# Altium PCB ESP32_SENSORS_BATTERY.PcbDoc
Units mm, origin at the board's own origin, x right, y up, seen from the top; angles counter-clockwise.
Board outline 54 x 48.94 mm, 2 copper layers (Top Layer, Bottom Layer); 31 components, 23 nets, 153 pads, 0 vias.
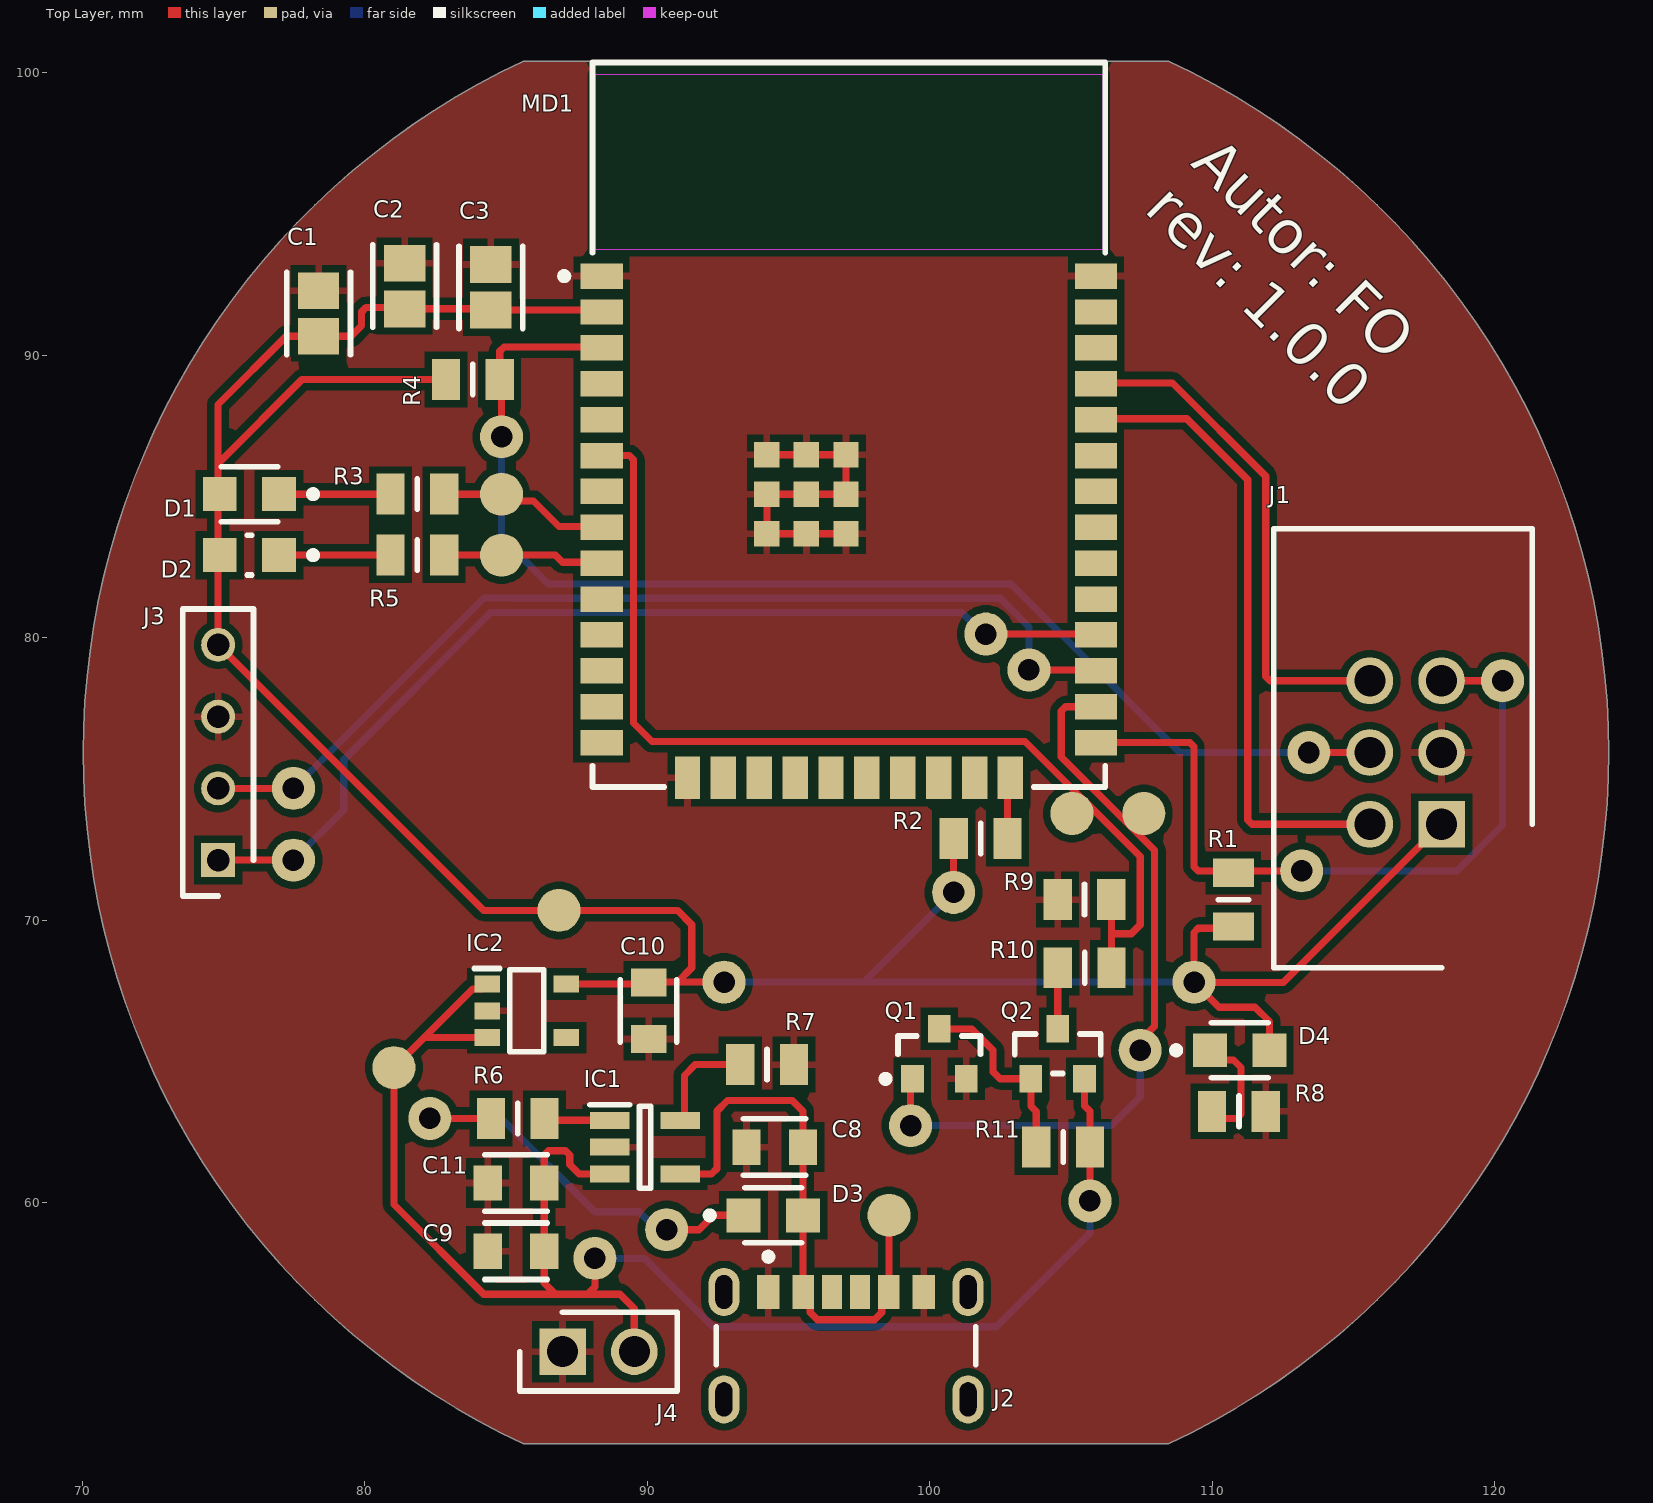
[diagram p0: Top Layer view]
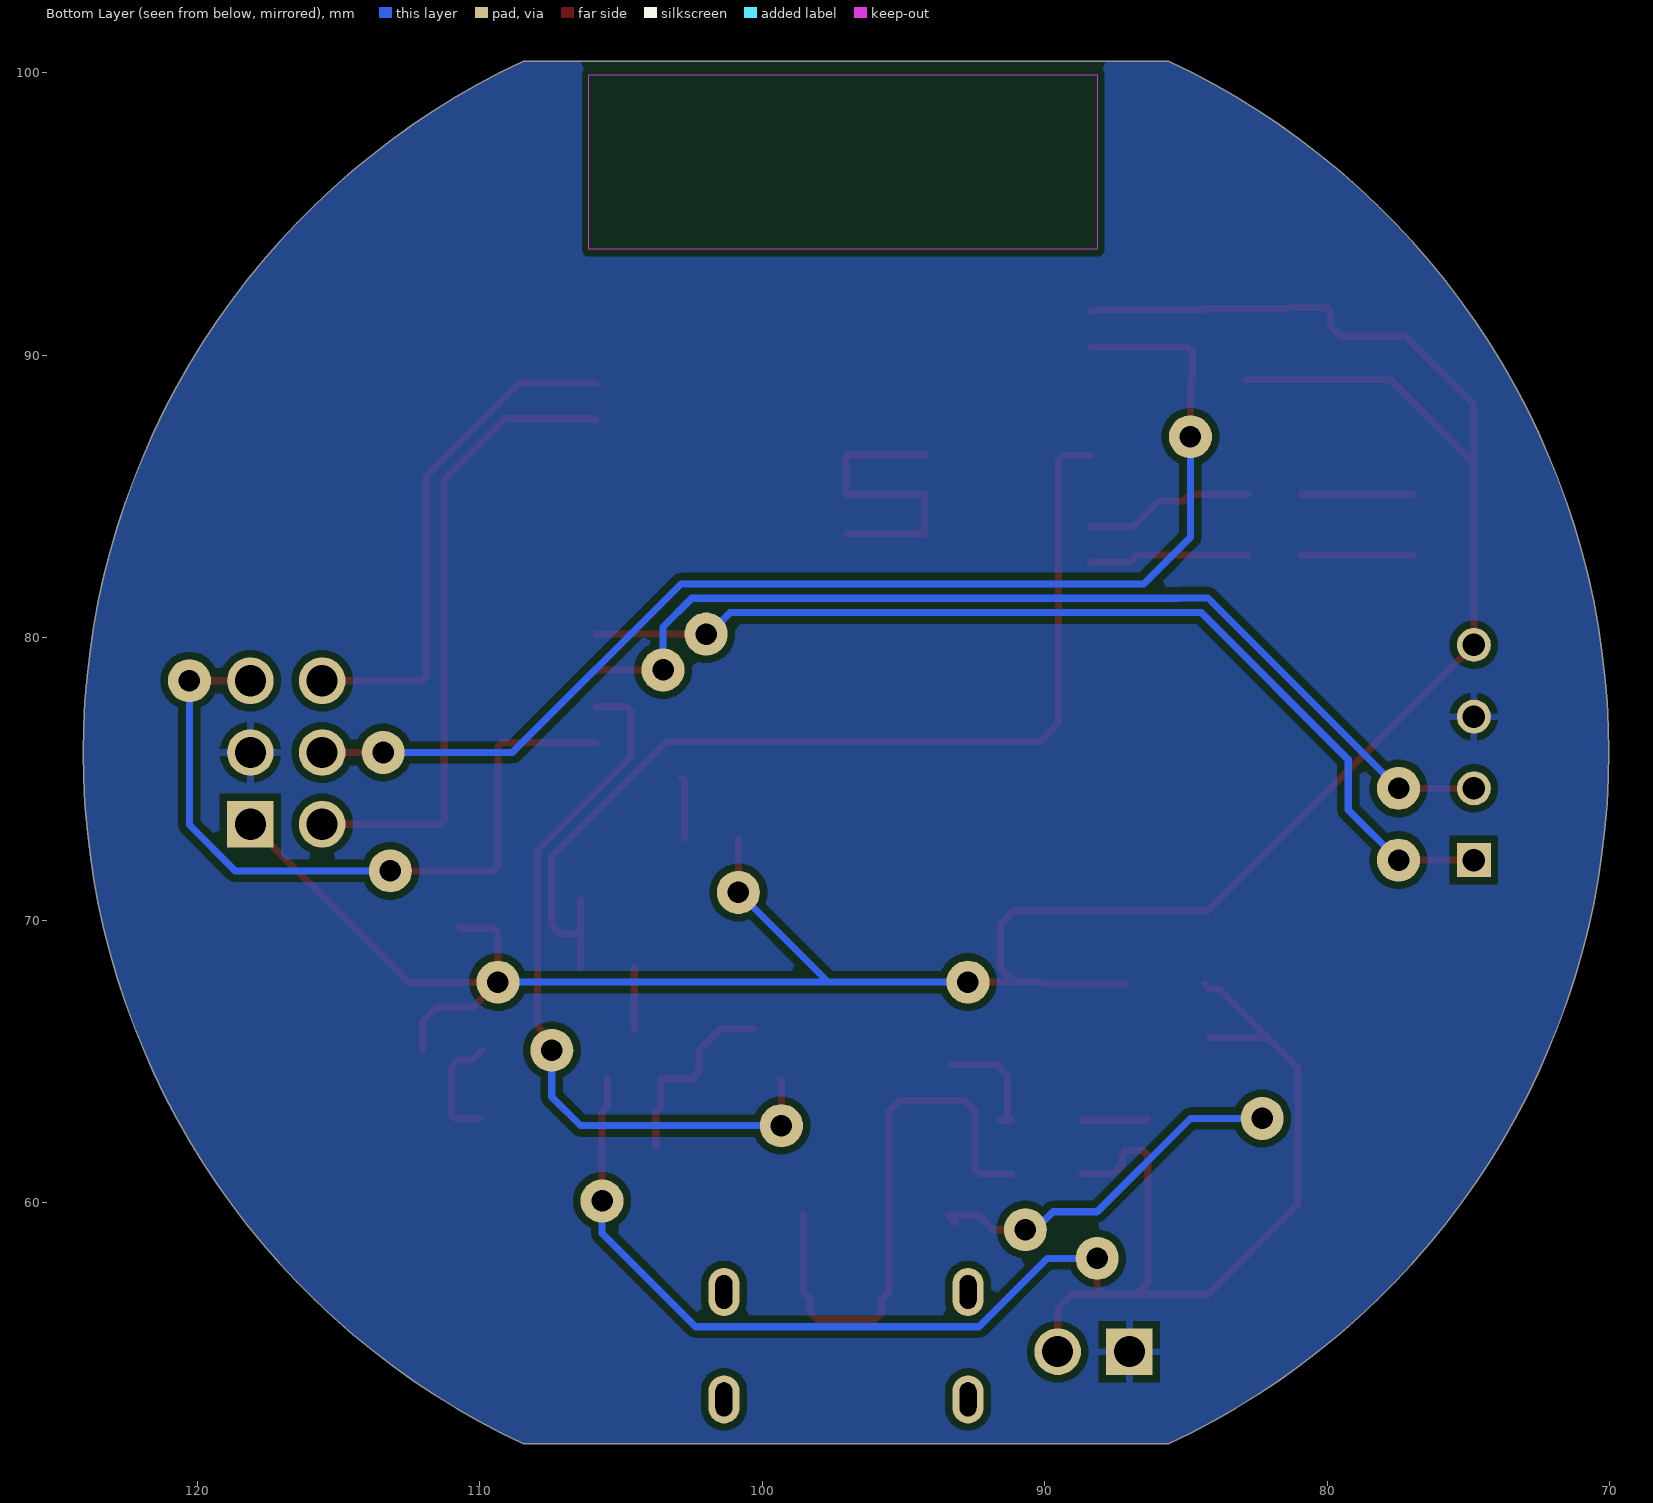
[diagram p1: Bottom Layer view, seen from below]
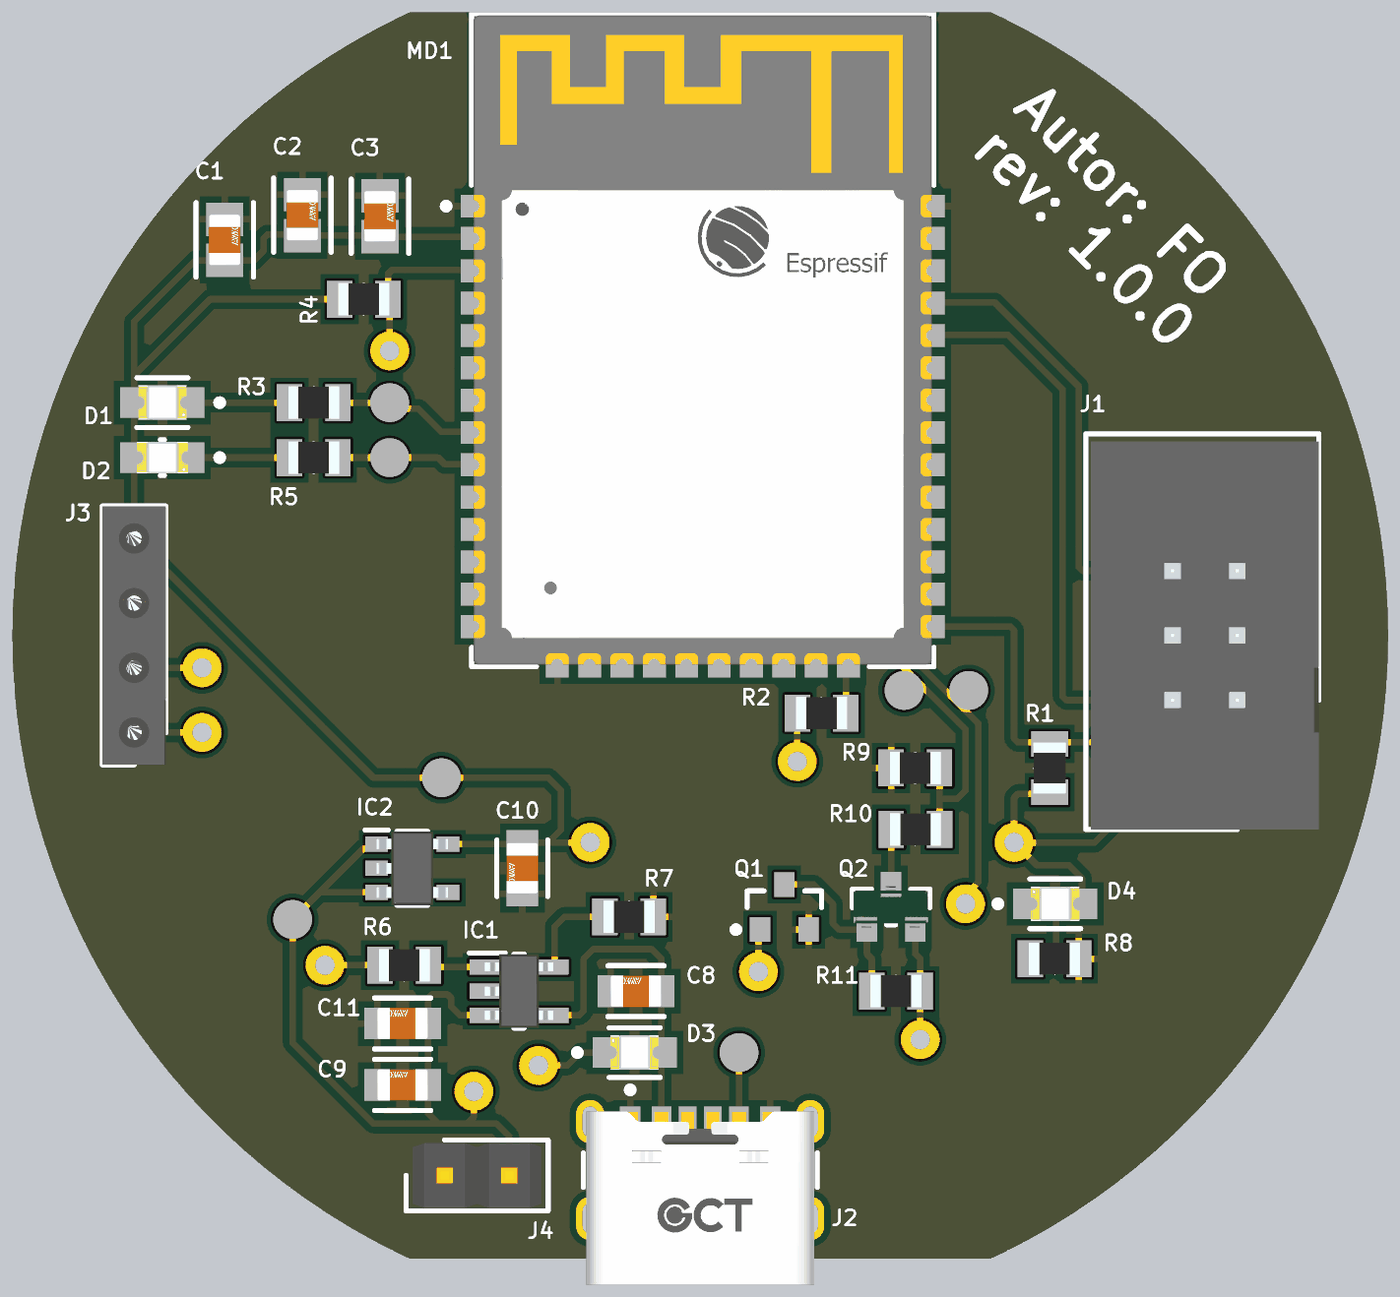
[diagram p2: 3D render of the assembled board from above, using the file's embedded part models]

## Layer stack, top to bottom
Top Solder: solder mask 0.0102, Solder Resist, Dk 3.5
Top Layer: signal copper 0.0356
Dielectric 1: dielectric 0.32, FR-4, Dk 4.8
Bottom Layer: signal copper 0.0356
Bottom Solder: solder mask 0.0102, Solder Resist, Dk 3.5

## Board outline
85.614,51.477 108.442,51.477 ccw(c97.028,75.946) 108.442,100.415 85.614,100.415 ccw(c97.028,75.946)

## Design rules (kind name [scope] priority, off if disabled: settings)
Clearance [All] p1: gap=0.254 ignorepadtopadclearanceinfootprint=FALSE
MinimumSolderMaskSliver [All] p1: minsoldermaskwidth=0.1
PolygonConnect [All] p1: connectstyle=Relief reliefconductorwidth=0.254 reliefentries=4 polygonreliefangle="90 Angle" airgapwidth=0.254
RoutingVias [All] p1: holewidth=0.711 width=1.27 viastyle="Through Hole" minholewidth=0.711 minwidth=1.27 maxholewidth=0.711 maxwidth=1.27
SilkToSolderMaskClearance [IsPad] p1: minsilkscreentomaskgap=0.1 clearancetoexposedcopper=TRUE
SolderMaskExpansion [All] p1: expansion=0.102 istentingtop=FALSE
SupplyNets "Schematic Supply Nets_3" [InNet('5V')] p1: voltage=0.000
SupplyNets "Schematic Supply Nets_2" [InNet('GND')] p2: voltage=0.000
SupplyNets "Schematic Supply Nets_1" [InNet('3.3V')] p3: voltage=0.000
SupplyNets "Schematic Supply Nets" [InNet('BAT +')] p4: voltage=0.000
Width [All] p1: maxlimit=0.254 minlimit=0.254 preferedwidth=0.254
28 further rules are at their usual default settings.

## Classes and differential pairs
component class U_Power: C8 C9 C10 C11 D3 D4 IC1 IC2 R6 R7 R8
component class ESP32: C1 C2 C3 D1 D2 J1 J2 J3 J4 MD1 Q1 Q2 R1 R2 R3 R4 R5 R9 R10 R11

## Components (designator, comment, footprint, x,y, rotation, side; value= is the part's Value field where it differs from the comment)
C1 "10uF" FP-0805-L_2_01_0_2-W_1_25-IPC_B 78.359,91.484 r90 top
C2 "10uF" FP-0805-L_2_01_0_2-W_1_25-IPC_B 81.407,92.456 r90 top
C3 "100nF" FP-0805-L_2_01_0_2-W_1_25-IPC_B 84.455,92.412 r90 top
C8 "100nF" FP-0805-L_2_01_0_2-W_1_25-MFG 94.504,61.976 r180 top
C9 "100nF" FP-0805-L_2_01_0_2-W_1_25-MFG 85.344,58.293 r180 top
C10 "100nF" FP-0805-L_2_01_0_2-W_1_25-MFG 90.043,66.802 r270 top
C11 "100nF" FP-0805-L_2_01_0_2-W_1_25-MFG 85.344,60.706 r180 top
D1 "LS R976-NR-1 LED RED" FP-LS_R976-MFG 75.912,85.09 r180 top
D2 "LO R976-PS-1 LED ORANGE" FP-LO_R976-MFG 75.912,82.931 r180 top
D3 "LS R976-NR-1 LED RED" FP-LS_R976-MFG 94.454,59.563 r0 top
D4 "LS R976-NR-1 LED RED" FP-LS_R976-MFG 110.964,65.405 r0 top
IC1 "MCP73831T-2ATI_OT" SOT95P270X145-5N 89.916,61.976 r0 top
IC2 "XC6210B332MR-G" SOT95P280X130-5N 85.725,66.802 r0 top
J1 "T821106A1S100CEU" SHDR6W64P254X254_2X3_1524X895X915P 118.11,73.406 r90 top
J2 "USB4125-GF-A-0190" FP-USB4125-GF-A-0190-MFG 97.028,53.848 r0 top
J3 "DS1023-1_4S21" RHDR4W60P0X254_1X4_1016X250X840P 74.803,72.136 r90 top
J4 "DS1021-1_2SF11-B" HDRV2W64P0X254_1X2_508X254X588P 86.995,54.737 r0 top
MD1 "ESP32-WROOM-32E (4MB)" FP-ESP32-WROOM-32E_4MB-MFG 97.128,87.547 r0 top
Q1 "IRLML2502TRPBF" INTR-SOT-23-3_V 100.33,65.278 r0 top
Q2 "IRLML6402TRPBF" FP-Micro3-MFG 104.521,65.282 r90 top
R1 "10k" RESC2013X65N 110.744,70.739 r270 top
R2 "10k / NC" RESC2013X65N 101.793,72.898 r180 top
R3 "1k" RESC2013X65N 81.854,85.09 r180 top
R4 "10k" RESC2013X65N 83.82,89.154 r180 top
R5 "1k" RESC2013X65N 81.854,82.931 r180 top
R6 "10k" RESC2013X65N 85.41,62.992 r180 top
R7 "2k" RESC2013X65N 94.234,64.897 r180 top
R8 "1k" RESC2013X65N 110.937,63.246 r180 top
R9 "100k" RESC2013X65N 105.471,70.739 r180 top
R10 "100k" RESC2013X65N 105.476,68.326 r0 top
R11 "100k" RESC2013X65N 104.714,61.976 r180 top

## Footprints (in the part's own frame and the unit in brackets; to place one, negate y for a bottom-side part, rotate by r counter-clockwise, add the part's x,y. Pads: shape width x height; smd on the part's side, far side on the other; paste and mask are expansions set on the pad)
FP-0805-L_2_01_0_2-W_1_25-IPC_B [mm]
  rect 1.305x1.456 smd paste+0 mask+0: 1(-0.806,0) 2(0.806,0)
  silkscreen extent -1.46,-1.13 1.46,1.13, body extent -1.71,-0.98 1.71,0.98, height 0.25
FP-0805-L_2_01_0_2-W_1_25-MFG [mm]
  rect 1x1.25 smd paste+0 mask+0: 1(-1,0) 2(1,0)
  silkscreen extent -1.1,-1 1.1,1, body extent -1.6,-0.82 1.6,0.82, height 0.25
FP-ESP32-WROOM-32E_4MB-MFG [mm]
  rect 1.5x0.9 smd paste+0 mask+0: 1(-8.75,5.26) 2(-8.75,3.99) 3(-8.75,2.72) 4(-8.75,1.45) 5(-8.75,0.18) 6(-8.75,-1.09) 7(-8.75,-2.36) 8(-8.75,-3.63) 9(-8.75,-4.9) 10(-8.75,-6.17) 11(-8.75,-7.44) 12(-8.75,-8.71) 13(-8.75,-9.98) 14(-8.75,-11.25) 25(8.75,-11.25) 26(8.75,-9.98) 27(8.75,-8.71) 28(8.75,-7.44) 29(8.75,-6.17) 30(8.75,-4.9) 31(8.75,-3.63) 32(8.75,-2.36) 33(8.75,-1.09) 34(8.75,0.18) 35(8.75,1.45) 36(8.75,2.72) 37(8.75,3.99) 38(8.75,5.26)
  rect 0.9x1.5 smd paste+0 mask+0: 15(-5.71,-12.5) 16(-4.44,-12.5) 17(-3.17,-12.5) 18(-1.9,-12.5) 19(-0.63,-12.5) 20(0.64,-12.5) 21(1.91,-12.5) 22(3.18,-12.5) 23(4.45,-12.5) 24(5.72,-12.5)
  rect 0.9x0.9 smd paste+0 mask+0: 39(-2.9,-3.86) 39(-2.9,-2.46) 39(-2.9,-1.06) 39(-1.5,-3.86) 39(-1.5,-2.46) 39(-1.5,-1.06) 39(-0.1,-3.86) 39(-0.1,-2.46) 39(-0.1,-1.06)
  Keep-Out Layer region: -9,6.205 9,6.205 9,12.395 -9,12.395
  Keep-Out Layer region: -9,6.205 9,6.205 9,12.395 -9,12.395
  silkscreen extent -10.2,-12.83 9.08,12.83, body extent -9.6,-13.35 9.6,12.93, height 0.25
FP-LO_R976-MFG [mm]
  rect 1.2x1.2 smd paste+0 mask+0: 1(-1.05,0) 2(1.05,0)
  silkscreen extent -2.38,-0.7 0.08,0.7, body extent -1.75,-0.8 1.75,0.8, height 0.25
FP-LS_R976-MFG [mm]
  rect 1.2x1.2 smd paste+0 mask+0: 1(-1.05,0) 2(1.05,0)
  silkscreen extent -2.38,-0.97 1,0.97, body extent -1.75,-0.8 1.75,0.8, height 0.25
FP-Micro3-MFG [mm]
  rect 0.972x0.802 smd paste+0 mask+0: 1(-0.885,0.95) 2(-0.885,-0.95) 3(0.885,0)
  silkscreen extent -0.7,-1.52 0.7,1.52, body extent -1.47,-1.87 1.47,1.87, height 0.25
FP-USB4125-GF-A-0190-MFG [mm]
  rrect100% 1.1x1.7 hole 1.2 slot 0.6 at 0 deg paste-2539.97 mask+0: 1(-4.32,3) 2(4.32,3) 3(-4.32,-0.8) 4(4.32,-0.8)
  rect 0.7x1.2 smd paste+0 mask+0: A5(-0.5,3) B5(0.5,3)
  rect 0.76x1.2 smd paste+0 mask+0: A9(1.52,3) B9(-1.52,3)
  rect 0.8x1.2 smd paste+0 mask+0: A12(2.75,3) B12(-2.75,3)
  silkscreen extent -4.59,0.43 4.59,4.37, body extent -4.97,-3.57 4.97,3.95, height 0.25
HDRV2W64P0X254_1X2_508X254X588P [mm]
  rect 1.65x1.65 hole 1.1: 1(0,0)
  round 1.65 hole 1.1: 2(2.54,0)
  silkscreen extent -1.52,-1.4 4.06,1.4, body extent -1.27,-1.27 3.81,1.27, height 8.61
INTR-SOT-23-3_V [mm] "SOT23, 3-Leads, Body 2.92x1.3mm, Pitch 1.9mm"
  rect 0.802x0.972 smd: 1(-0.95,-0.885) 2(0.95,-0.885) 3(0,0.885)
  silkscreen extent -2.03,-1.01 1.46,0.64, body extent -1.46,-0.65 1.46,0.65, height 1.12
RESC2013X65N [mm]
  rect 1x1.45 smd: 1(-0.95,0) 2(0.95,0)
  silkscreen extent 0,-0.54 0,0.54, body extent -1,-0.64 1,0.64, height 0.65
RHDR4W60P0X254_1X4_1016X250X840P [mm]
  rect 1.2x1.2 hole 0.8: 1(0,0)
  round 1.2 hole 0.8: 2(2.54,0) 3(5.08,0) 4(7.62,0)
  silkscreen extent -1.27,-1.25 8.89,1.25, body extent -1.27,-1.25 8.89,1.25, height 8.4
SHDR6W64P254X254_2X3_1524X895X915P [mm]
  rect 1.65x1.65 hole 1.1: 1(0,0)
  round 1.65 hole 1.1: 2(0,2.54) 3(2.54,0) 4(2.54,2.54) 5(5.08,0) 6(5.08,2.54)
  silkscreen extent -5.08,-3.2 10.46,5.94, body extent -5.08,-3.2 10.16,5.74, height 9.15
SOT95P270X145-5N [mm]
  rect 1.4x0.6 smd: 1(-1.25,0.95) 2(-1.25,0) 3(-1.25,-0.95) 4(1.25,-0.95) 5(1.25,0.95)
  silkscreen extent -1.95,-1.45 0.2,1.5, body extent -1.35,-1.45 1.35,1.45, height 1.45
SOT95P280X130-5N [mm]
  rect 0.9x0.6 smd: 1(-1.4,0.95) 2(-1.4,0) 3(-1.4,-0.95) 4(1.4,-0.95) 5(1.4,0.95)
  silkscreen extent -1.85,-1.45 0.6,1.5, body extent -1.4,-1.45 1.4,1.45, height 1.3

## Part data
C1 C2 C3: library part CMP-04427-003009-1, "Automotive Ceramic Capacitor, 0805, 22nF, 5%, X7R, 15%, 100V", Capacitance=22nF, Case Code (Imperial)=0805, Case Code (Metric)=2012, Dielectric=X7R, Max Operating Temperature=125°C, Min Operating Temperature=-55°C, Package Quantity=4000, Ratings=AEC-Q200, Tolerance=5%, Voltage Rating=100V, Case/Package=0805, Construction=Flat, Depth=1.25mm, Dissipation Factor=2.5%, Height=0.94mm, Lead Free="Lead Free", Length=2.01mm, Mount="Surface Mount", Number of Pins=2, Packaging="Tape and Reel", Radiation Hardening=No, RoHS Compliant=Yes, Series=-, Termination=SMD/SMT, Thickness=0.037inch, Voltage Rating (DC)=100V, Width=0.049inch
C8 C9 C10 C11: library part CMP-2007-04762-2, "Automotive Ceramic Capacitor, 0805, 100nF, 5%, X7R, 15%, 100V", Case Code (Imperial)=0805, Case Code (Metric)=2012, Dielectric=X7R, Max Operating Temperature=125°C, Min Operating Temperature=-55°C, Package Quantity=2000, Ratings=AEC-Q200, Tolerance=5%, Voltage Rating=100V, Capacitance=100nF, Case/Package=0805, Construction=Flat, Depth=1.25mm, Height=1.4mm, Lead Free="Lead Free", Length=2.01mm, Mount="Surface Mount", Number of Pins=2, Packaging="Tape and Reel", RoHS Compliant=Yes, Series=-, Termination=SMD/SMT, Thickness=0.055inch, Voltage Rating (DC)=100V, Weight=0.000194oz, Width=0.049inch
D1 D3 D4: library part CMP-62016-000037-1, "LED RED DIFFUSED 0805 SMD", Case Code (Imperial)=0805, Case Code (Metric)=2012, Color=Red, Forward Current=25mA, Forward Voltage=2.5V, Lens Color=White, Max Operating Temperature=85°C, Min Operating Temperature=-30°C, Package Quantity=16000, Power Dissipation=65W, Reverse Voltage=12V, Test Current=20mA, Case/Package=0805, Depth=1.35mm, Dominant Wavelength=633nm, Height=0.9mm, Illumination Color=Red, Length=2mm, Lens Size=1.25mm, Lens Style=Flat, Lens Transparency=Diffused, Luminous Flux=0.47lm, Luminous Intensity=180mcd, Mount="Surface Mount", Number of Elements=1, Number of LEDs=1, Number of Pins=2, Packaging="Tape and Reel", Radiation Hardening=No, Viewing Angle=160°, Width=1.25mm
D2: library part CMP-62016-000030-1, "LED ORANGE DIFFUSED 0805 SMD", Case Code (Imperial)=0805, Case Code (Metric)=2012, Color=Orange, Forward Current=25mA, Forward Voltage=2V, Lens Color=White, Max Operating Temperature=85°C, Min Operating Temperature=-30°C, Package Quantity=16000, Reverse Voltage=12V, Test Current=20mA, Case/Package=0805, Contact Plating=Tin, Dominant Wavelength=606nm, Height=0.9mm, Illumination Color=Orange, Length=2mm, Lens Size=1.25mm, Lens Style=Flat, Lens Transparency=Diffused, Luminous Flux=0.735lm, Luminous Intensity=162.5mcd, Mount="Surface Mount", Number of LEDs=1, Number of Pins=2, Packaging="Tape and Reel", Radiation Hardening=No, Viewing Angle=160°, Width=1.25mm
IC1: "Integrated Circuit", Arrow Part Number=MCP73831T-2ATI/OT, Manufacturer_Name=Microchip, Mouser Part Number=579-MCP73831T-2ATIOT, Arrow Price/Stock=https://www.arrow.com/en/products/mcp73831t-2atiot/microchip-technology?utm_currency=USD&region=nac, Datasheet Link=https://datasheet.datasheetarchive.com/originals/distributors/Datasheets-DGA15/727147.pdf, Height=1.45mm, Manufacturer_Part_Number=MCP73831T-2ATI/OT, Mouser Price/Stock=https://www.mouser.co.uk/ProductDetail/Microchip-Technology/MCP73831T-2ATI-OT?qs=yUQqVecv4qsZbioEUu%252B83g%3D%3D
IC2: "Integrated Circuit", Manufacturer_Name=Torex, Mouser Part Number=865-XC6210B332MR-G, Datasheet Link=https://www.torexsemi.com/file/xc6210/XC6210.pdf, Height=1.3mm, Manufacturer_Part_Number=XC6210B332MR-G, Mouser Price/Stock=https://www.mouser.co.uk/ProductDetail/Torex-Semiconductor/XC6210B332MR-G?qs=AsjdqWjXhJ%2FS4LOuBYdYHQ%3D%3D
J1: "Connector", Manufacturer_Name=Amphenol, Mouser Part Number=N/A, Arrow Part Number=T821106A1S100CEU, Arrow Price/Stock=https://www.arrow.com/en/products/t821106a1s100ceu/amphenol?region=europe, Height=9.15mm, Manufacturer_Part_Number=T821106A1S100CEU, Mouser Price/Stock=https://www.mouser.co.uk/ProductDetail/Amphenol/T821106A1S100CEU?qs=%252BRAvXJslkuCjsmzKMnqFCQ%3D%3D
J2: library part CMP-245163-000004-1, "CONN RCPT TYPE C 6P SMD RA"
J3: "Connector", Manufacturer_Name=Connfly, Manufacturer_Part_Number=DS1023-1*4S21, Datasheet Link=https://www.tme.eu/Document/951e887d7e645db1a4e49e0834499c9b/zl262-sg.pdf, Height=8.4mm
J4: "Connector", Manufacturer_Name=Connfly, Manufacturer_Part_Number=DS1021-1*2SF11-B, Datasheet Link=https://www.tme.com/Document/cc301e58a5da78cb543a94b5a5b7f06a/DS1021.pdf, Height=5.88mm
MD1: library part CMP-194065-000026-1, "RX TXRX MOD WIFI TRACE ANT SMD"
Q1: library part CMP-2000-04985-1, "N-Channel HEXFET(R) Power MOSFET, 20 V VDS, +/- 12 V VGS, 4.2 A, 3-Pin SOT23, RoHS, Tape and Reel", Drain-Source On Resistance-Max=0.045O, Drain-to-Source Voltage [Vdss]=20V, Manufacturer="International Rectifier", Package Description="3-Pin Small Outline Transistor, Body 2.92 x 1.3 mm, Pitch 0.95 mm", Package Reference=SOT-23-3, Rated Power Dissipation=1.25W, Channel Type=N-Channel, Datasheet URL=https://datasheet.ciiva.com/6383/irlml2502pbf-6383216.pdf, Datasheet Version=Apr-14, Manufacturer URL=http://internationalrectifier.com/, Qg Gate Charge=8nC
Q2: library part CMP-32901-000130-1, "MOSFET P-CH 20V 3.7A SOT-23", Continuous Drain Current=-3.7A, Drain To Source Breakdown Voltage=-20V, Drain To Source Resistance=0.05Ω, Gate To Source Voltage=12V, Input Capacitace At Vds="633pF @ -10V", Manufacturer=Infineon, Max Forward Diode Voltage=-1.2V, Max Junction Temp=+150°C, Package=Micro3, Power Dissipation=1.3W, Pulse Drain Current=-22A, Temperature="-55°C to +150°C", Temperature Range Low=-55°C, Automotive=No, Category=Trans, ComponentLink2Description=Datasheet, ComponentLink2URL=https://www.infineon.com/dgdl/irlml6402pbf.pdf?fileId=5546d462533600a401535668d5c2263c, Depletion Mode=False, Device Class L1="Discrete Semiconductors", Device Class L2=Transistors, Device Class L3=MOSFETs, Digikey Description="MOSFET P-CH 20V 3.7A SOT-23", Drain To Source Voltage=-20V, Footprint Url=http://irf.com/package/outline/po_micro3.pdf, Gate Charge At Vgs="8nC @ -5V", Height=1.12mm, Ipc Land Pattern Name=SOT95P237X100-3, Lead Free=Yes, Manufacturer Part Number=IRLML6402TRPBF, Number Of Channels=1, Number Of P Channels=1, Octopart=https://octopart.com/irlml6402trpbf-infineon-65874989, Reverse Recovery Charge=11nC, Reverse Recovery Time=29ns, RoHS=TRUE, Rthja Max=75°C/W, Standoff Height=0.01mm, Technology=MOSFET, Temperature Range High=+150°C, Threshold Vgs=-0.55V, Threshold Vgs Max=-1.2V, Threshold Vgs Min=-0.4V, Turn Off Delay Time=588ns, Turn On Delay Time=350ns
R1 R2 R3 R4 R5 R6 R7 R8 R9 R10 R11: library part 0805W8F1000T5E, "Resistor", Manufacturer_Name="UNI-ROYAL(Uniroyal Elec)", Datasheet Link=https://datasheet.lcsc.com/szlcsc/Uniroyal-Elec-0805W8F1000T5E_C17408.pdf, Height=0.65mm, Manufacturer_Part_Number=0805W8F1000T5E

## Free pads (board coordinates)
  round 1.524 hole 0.762: 5(82.296,62.992) 6(88.138,58.039) 6(90.678,59.055) 6(105.664,60.071) 7(103.505,78.867) 8(101.981,80.137) 9(77.47,74.676) 10(77.47,72.136) 11(99.314,62.738) 12(107.442,65.405) 13(109.347,67.818) 14(92.71,67.818) 15(113.411,75.946) 16(84.836,87.122) 17(113.157,71.755) 18(120.269,78.486) 19(100.838,70.993)
  round 1.524 smd: 20(84.836,85.09) 22(84.836,82.931) 23(86.868,70.358) 24(81.026,64.792) 25(98.552,59.563) 26(107.569,73.787) 27(105.029,73.787)

## Nets (pads, with @x,y where several pads share a name; then routed paths per layer and width w, separated by ;. In a path a pad name is that pad's centre, name@x,y a point inside that pad or via, vN(x,y) a via of type N, cw(c..) or ccw(c..) an arc to the next point about the centre after c; other vN are vias at no path point)
3.3V: C1.1 C2.1 C3.1 C10.1 D1.2 D2.2 D4.2 IC2.5 J1.1 J3.4 MD1.2 pad.13 pad.14 pad.19 pad.23 R1.2 R2.2 R4.2 | length 103.5
  Top Layer w0.254: R4.2 77.783,89.154 74.862,86.233 74.803,86.292 ; IC2.5 89.993,67.752 C10.1 90.059,67.818 91.059,67.818 ; MD1.2 88.309,91.606 C3.1 84.411,91.65 C2.1 81.363,91.694 80.032,91.694 79.883,91.545 79.883,91.059 79.502,90.678 C1.1 77.216,90.678 74.803,88.265 74.803,86.292 ; pad.14 91.059,67.818 ; pad.19 100.838,72.893 R2.2 ; R1.2 110.678,69.723 109.496,69.723 109.347,69.574 pad.13 pad.13@109.363,67.802 ; D4.2 112.014,66.421 111.506,66.929 110.236,66.929 pad.13@109.363,67.802 ; J1.1 112.506,67.802 pad.13@109.363,67.802 ; 74.803,86.292 J3.4 84.201,70.358 91.059,70.358 91.567,69.85 91.567,68.326 91.059,67.818
  Bottom Layer w0.254: pad.14 97.663,67.818 ; pad.19 97.663,67.818 ; pad.13 97.663,67.818
5V: C8.1 D3.2 IC1.4 J2.A9 J2.B9 pad.25 | length 20.3
  Top Layer w0.254: IC1.4 92.268,61.026 92.456,61.214 92.456,63.246 92.837,63.627 95.123,63.627 95.504,63.246 C8.1 D3.2 95.508,59.559 J2.B9 95.761,56.595 95.761,56.126 96.02,55.867 98.036,55.867 98.295,56.126 98.295,56.595 J2.A9 98.55,56.85 98.55,59.561 pad.25
"BAT +": C9.1 C11.1 IC1.3 IC2.1 IC2.3 J4.2 pad.6@88.138,58.039 pad.6@105.664,60.071 pad.24 Q2.2 R11.1 | length 57.9
  Top Layer w0.254: IC2.3@84.175,65.852 82.086,65.852 ; IC2.1 84.152,67.579 83.813,67.579 82.086,65.852 ; pad.6@88.138,58.039 88.138,57.023 87.884,56.769 ; IC1.3 87.585,61.027 87.249,61.363 87.249,61.7 87.1,61.849 86.493,61.849 86.344,61.7 C11.1 C9.1 86.344,57.166 86.741,56.769 ; J4.2 89.535,56.261 89.027,56.769 87.884,56.769 ; Q2.2 105.471,63.439 105.664,63.246 R11.1 pad.6@105.664,60.071 ; 82.086,65.852 pad.24 81.026,59.947 84.204,56.769 86.741,56.769 ; 86.741,56.769 87.884,56.769
  Bottom Layer w0.254: pad.6@88.138,58.039 89.9,58.039 92.322,55.617 102.353,55.617 105.664,58.928 pad.6@105.664,60.071
BAT-ADC: MD1.6 pad.27 R9.1 R10.2 | length 36.4
  Top Layer w0.254: MD1.6 89.36,86.457 89.509,86.308 89.509,76.988 90.159,76.338 103.367,76.338 107.442,72.263 107.442,69.85 107.124,69.532 106.426,69.532 ; R10.2 106.426,69.532 ; R9.1@106.426,70.739 106.426,69.532
BAT-ADC-EN: MD1.26 pad.11 pad.12 pad.26 Q1.1 | length 26.8
  Top Layer w0.254: pad.11 99.314,64.327 Q1.1 ; MD1.26 104.797,77.567 104.648,77.418 104.648,75.788 107.95,72.486 107.95,66.257 107.442,65.749 pad.12
  Bottom Layer w0.254: pad.11 106.426,62.738 107.442,63.754 pad.12
GND: C1.2 C2.2 C3.2 C8.2 C9.2 C10.2 C11.2 IC1.2 IC2.2 J1.3 J2.A12 J2.B12 J3.3 J4.1 MD1.1 MD1.15 MD1.38 MD1.39 Q1.2 R7.1 R8.1 R9.2 | length 11.2
  Top Layer w0.254: MD1.39@94.228,86.487 95.628,86.487 97.028,86.487 97.028,85.087 95.628,85.087 94.228,85.087 94.228,83.687 95.628,83.687 MD1.39@97.028,83.687
LED-ORANGE: MD1.9 pad.22 R5.1 | length 5.7
  Top Layer w0.254: R5.1 pad.22 86.741,82.931 86.995,82.677 88.348,82.677 MD1.9
LED-RED: MD1.8 pad.20 R3.1 | length 6.1
  Top Layer w0.254: R3.1 pad.20 85.079,84.847 85.968,84.847 86.868,83.947 88.348,83.947 MD1.8
NetD1_1: D1.1 R3.2 | length 3.9
  Top Layer w0.254: D1.1 R3.2
NetD2_1: D2.1 R5.2 | length 3.9
  Top Layer w0.254: D2.1 R5.2
NetD3_1: D3.1 pad.5 pad.6@90.678,59.055 R6.2 | length 15.5
  Top Layer w0.254: pad.5 R6.2 ; pad.6@90.678,59.055 91.821,59.055 92.329,59.563 D3.1 D3.1@93.15,59.309
  Bottom Layer w0.254: pad.5 84.836,62.992 88.138,59.69 89.699,59.69 90.334,59.055 pad.6@90.678,59.055
NetD4_1: D4.1 R8.2 | length 4.1
  Top Layer w0.254: D4.1 110.26,65.059 110.746,65.059 111.006,64.799 111.006,63.141 110.857,62.992 R8.2@109.987,62.992
NetIC1_1: IC1.1 R6.1 | length 2.3
  Top Layer w0.254: R6.1 86.426,62.926 IC1.1
NetIC1_5: IC1.5 R7.2 | length 4.2
  Top Layer w0.254: IC1.5@91.566,62.926 IC1.5 91.313,63.073 91.313,64.516 91.694,64.897 R7.2
NetJ1_2: J1.2 MD1.34 | length 22.7
  Top Layer w0.254: MD1.34 105.908,87.757 109.093,87.757 111.252,85.598 111.252,73.555 111.401,73.406 J1.2
NetJ1_4: J1.4 MD1.3 pad.15 pad.16 R4.1 | length 44.2
  Top Layer w0.254: pad.16 84.836,89.088 R4.1 84.77,90.148 84.919,90.297 88.348,90.297 MD1.3 ; pad.15 J1.4
  Bottom Layer w0.254: pad.16 84.836,83.566 86.487,81.915 102.87,81.915 108.839,75.946 pad.15
NetJ1_5: J1.5 MD1.25 pad.17 pad.18 R1.1 | length 26.7
  Top Layer w0.254: MD1.25 109.198,76.297 109.347,76.148 109.347,71.904 109.496,71.755 pad.17 ; J1.5 pad.18
  Bottom Layer w0.254: pad.17 118.648,71.755 120.269,73.376 pad.18
NetJ1_6: J1.6 MD1.35 | length 18.2
  Top Layer w0.254: MD1.35 105.908,89.027 108.585,89.027 111.887,85.725 111.887,78.635 112.036,78.486 J1.6
NetJ3_1: J3.1 MD1.28 pad.8 pad.10 | length 36.1
  Top Layer w0.254: J3.1 pad.10 ; pad.8 105.848,80.137 MD1.28
  Bottom Layer w0.254: pad.10 79.248,73.914 79.248,75.692 84.455,80.899 101.127,80.899 101.889,80.137 pad.8
NetJ3_2: J3.2 MD1.27 pad.7 pad.9 | length 35.8
  Top Layer w0.254: J3.2 pad.9 ; pad.7 105.848,78.867 MD1.27
  Bottom Layer w0.254: pad.9 84.212,81.418 85.228,81.418 85.239,81.407 102.489,81.407 103.505,80.391 pad.7
NetMD1_24: MD1.24 R2.1 | length 2.2
  Top Layer w0.254: R2.1 102.743,74.942 MD1.24
NetQ1_3: Q1.3 Q2.1 R11.2 | length 6.9
  Top Layer w0.254: Q1.3 101.477,66.163 102.235,65.405 102.235,64.643 102.481,64.397 Q2.1 103.571,63.434 103.764,63.241 R11.2
NetQ2_3: Q2.3 R10.1 | length 2.2
  Top Layer w0.254: Q2.3 104.521,68.321 R10.1
pads on no net: IC2.4 J2.1 J2.2 J2.3 J2.4 J2.A5 J2.B5 MD1.4 MD1.5 MD1.7 MD1.10 MD1.11 MD1.12 MD1.13 MD1.14 MD1.16 MD1.17 MD1.18 MD1.19 MD1.20 MD1.21 MD1.22 MD1.23 MD1.29 MD1.30 MD1.31 MD1.32 MD1.33 MD1.36 MD1.37

## Polygon pours and split planes (outlines as drawn)
GND on Bottom Layer "GND_L02_P000" (solid, pour order 0): 85.614,51.477 108.442,51.477 ccw(c97.028,75.946) 108.442,100.415 85.614,100.415 ccw(c97.028,75.946)
GND on Top Layer "GND_L01_P001" (solid, pour order 1): 85.614,51.477 cw(c97.028,75.946) 85.614,100.415 108.442,100.415 cw(c97.028,75.946) 108.442,51.477

## Silkscreen, mask and mechanical layers (free items; w line width, h text height)
Top Overlay:
  text "Autor: FO" at 109.198,96.774 h1.52 r315
  text "rev: 1.0.0" at 107.547,95.123 h1.52 r315
Mechanical 1:
  the board outline again, w0.254